# Altium PCB Copy of ISL6236 DEMO_PCB.PcbDoc
Units mm, origin at the board's own origin, x right, y up, seen from the top; angles counter-clockwise.
Board outline 50 x 50 mm, 6 copper layers (L1, L2, L3, L4, L5, L6), stack 1.231 mm thick; 41 components, 27 nets, 119 pads, 57 vias.
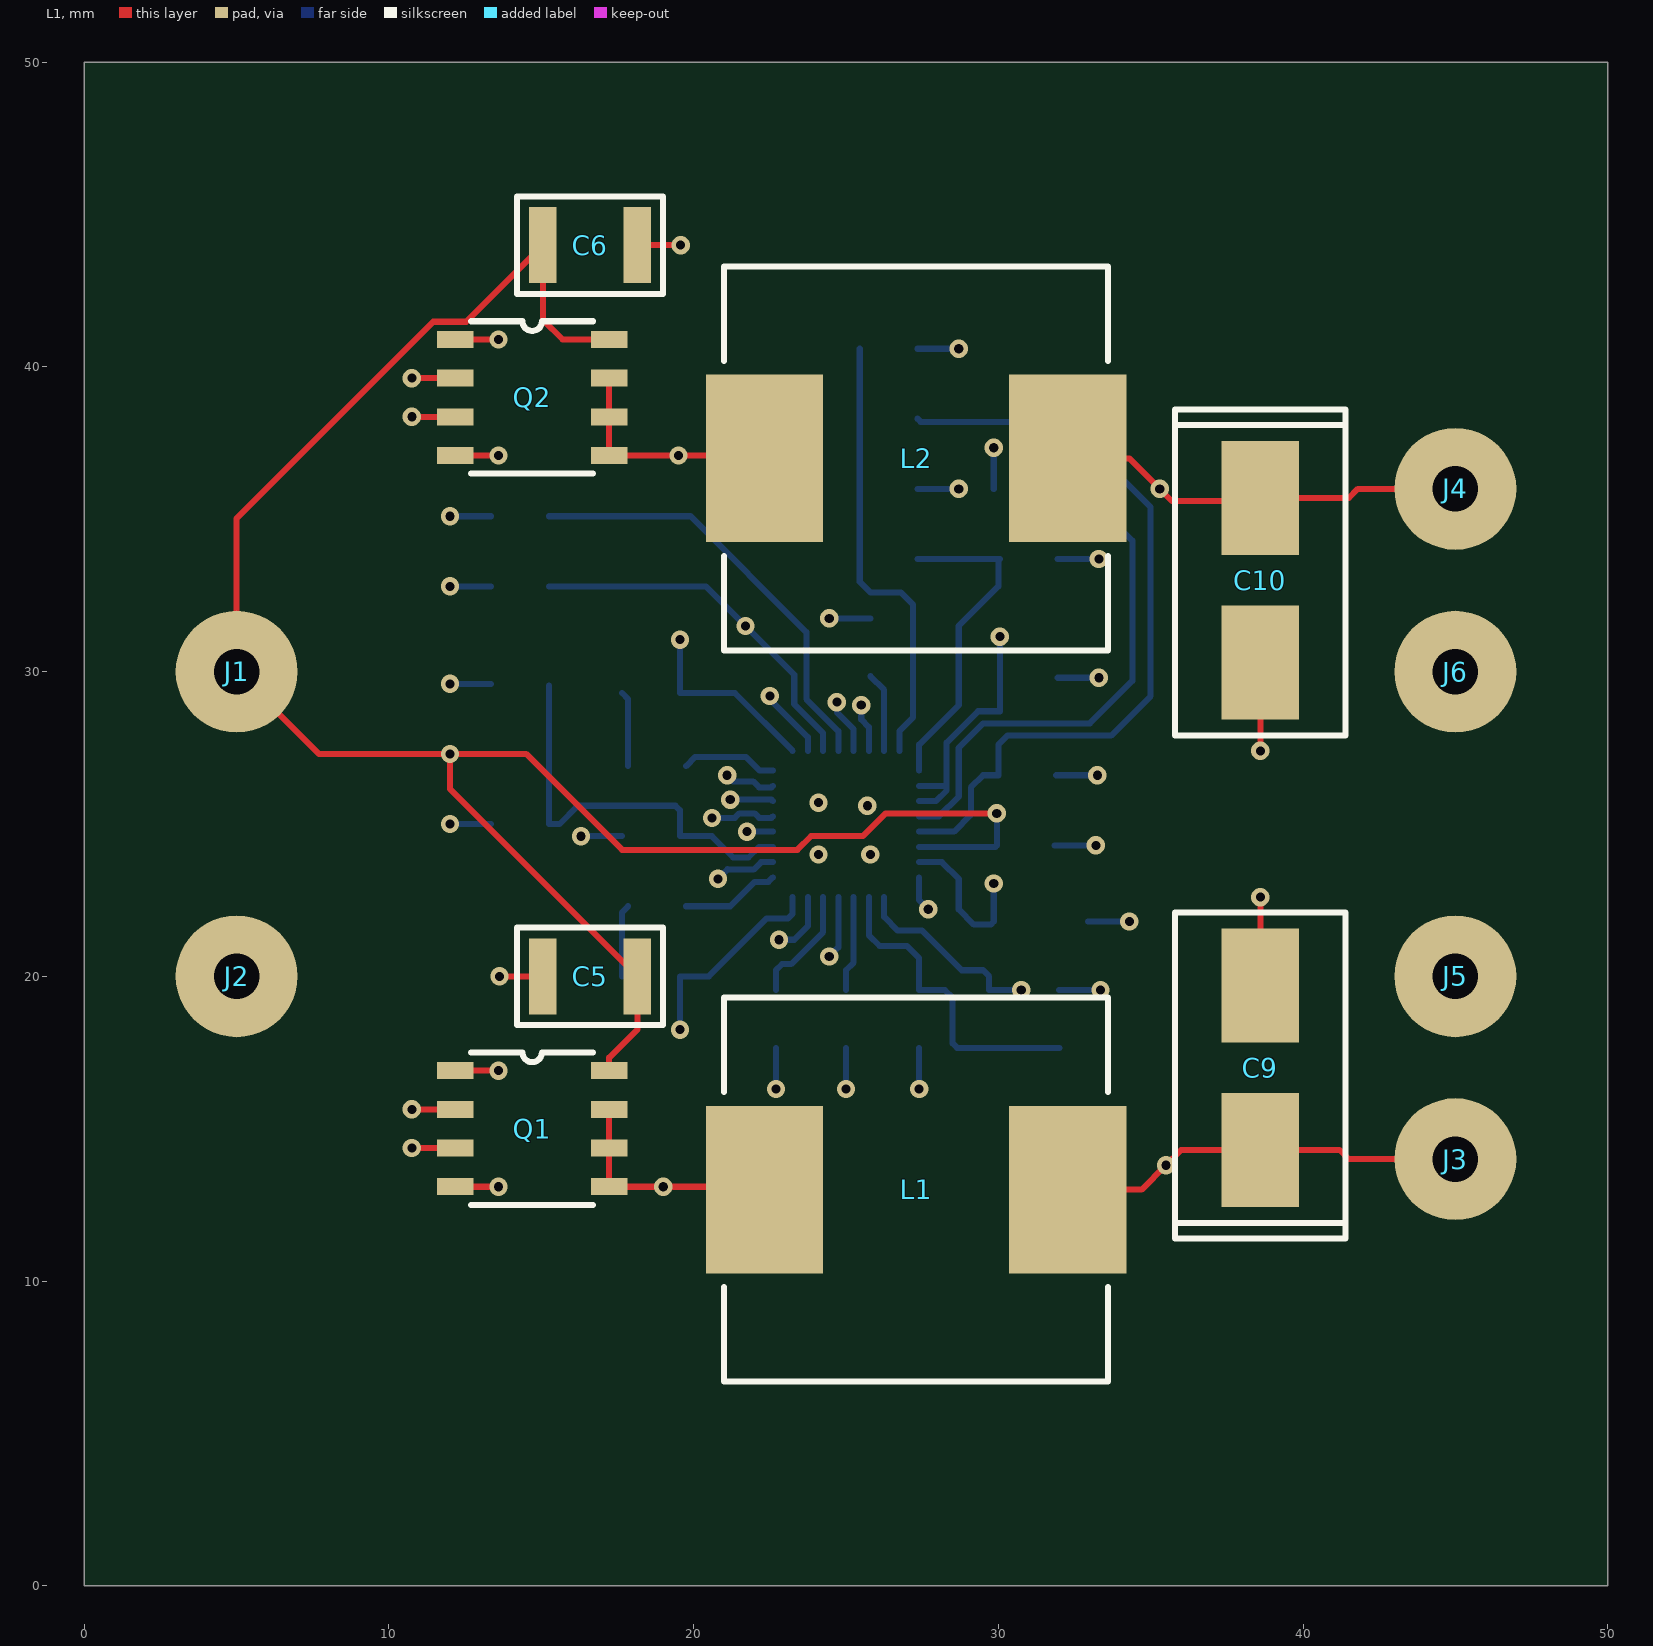
[diagram p0: L1 view]
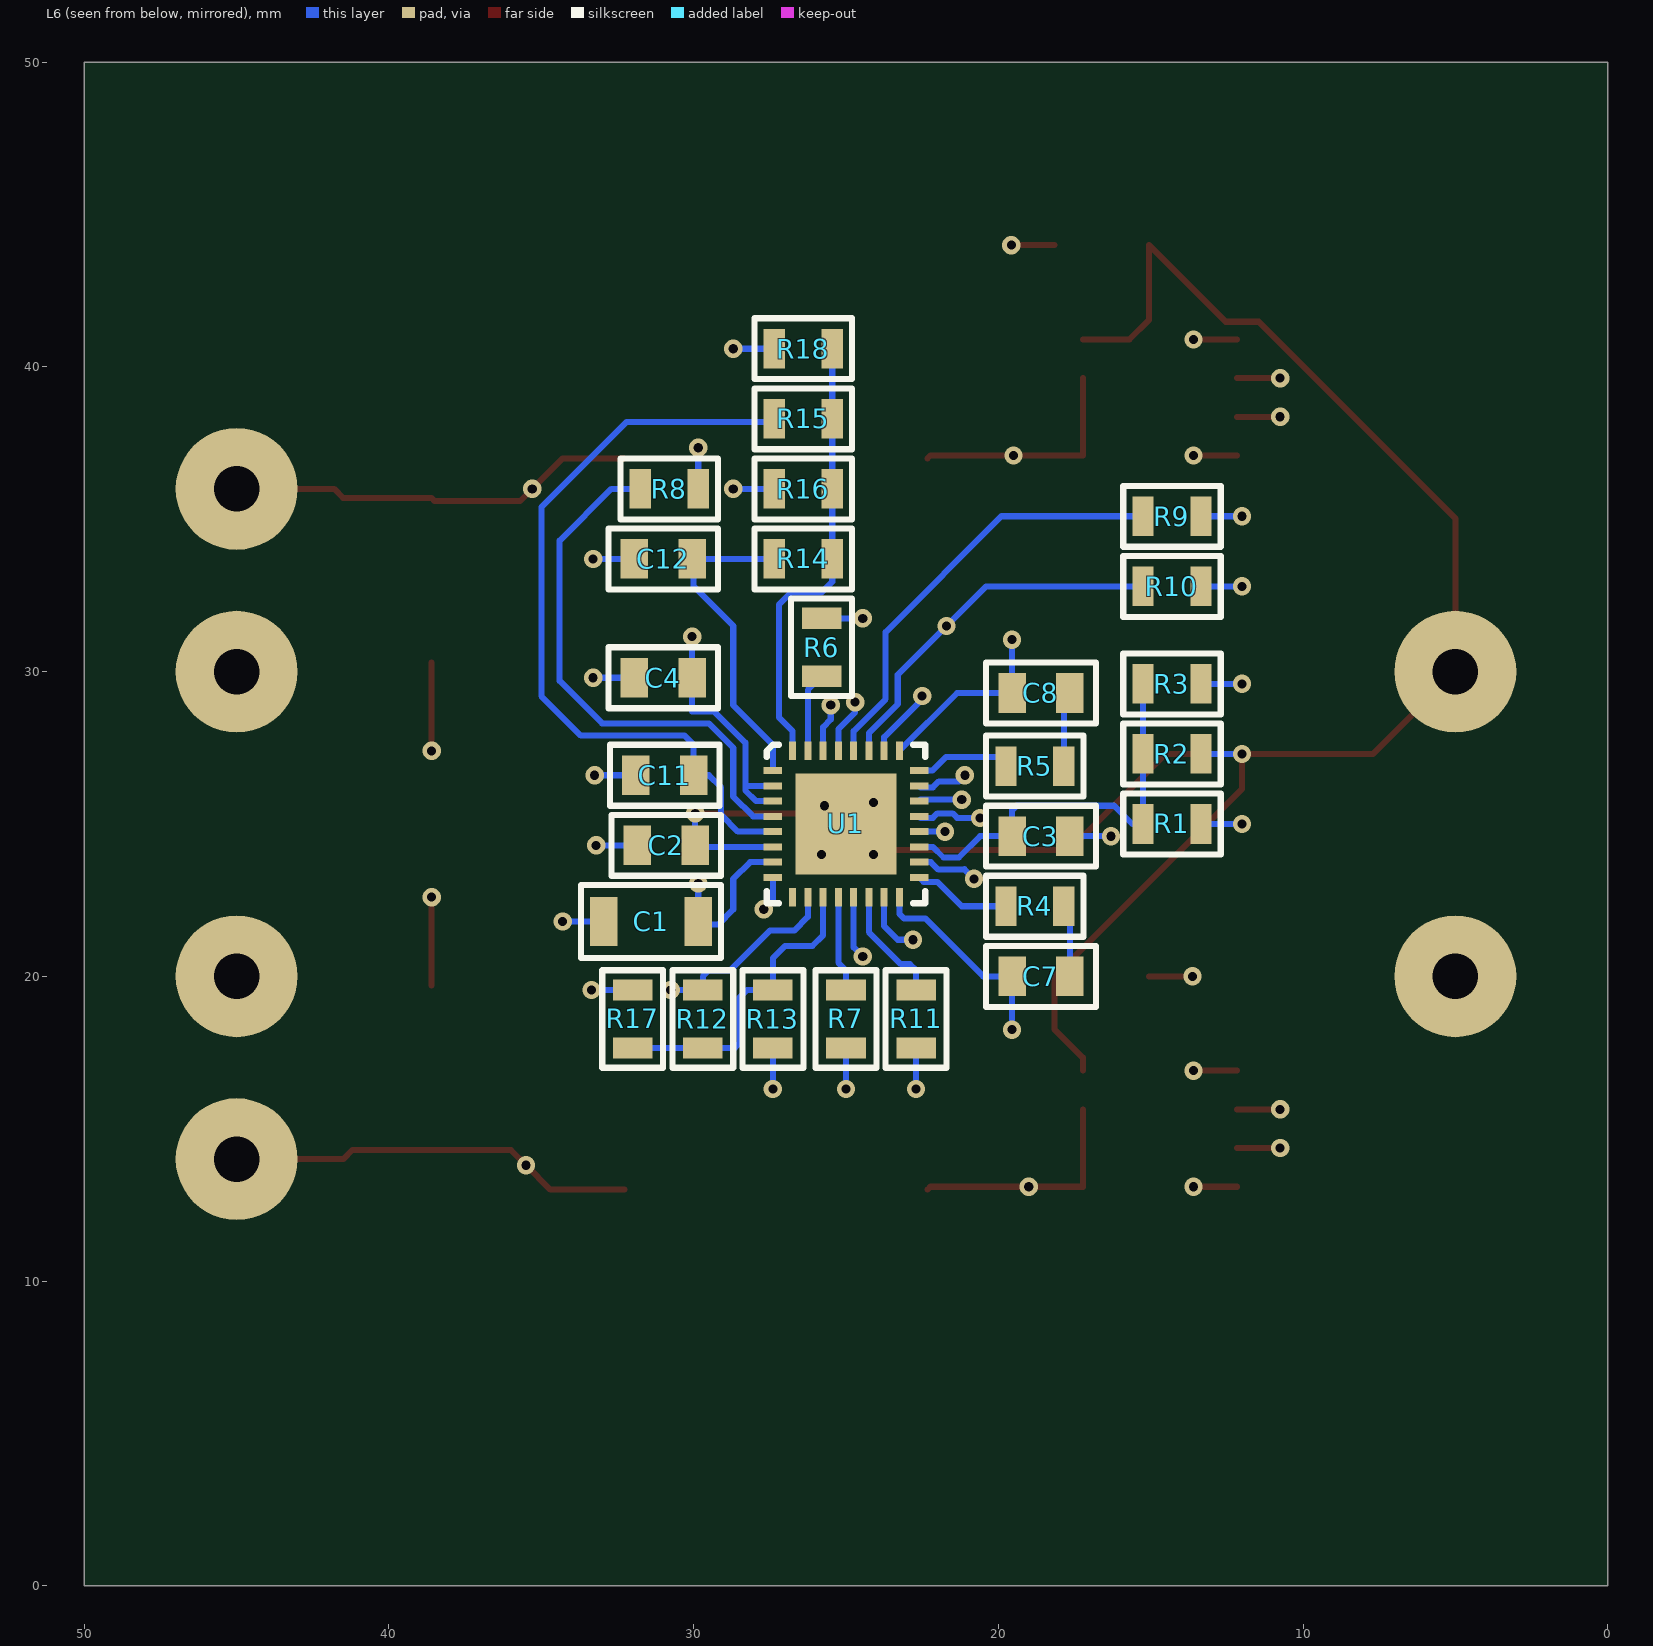
[diagram p1: L6 view, seen from below]
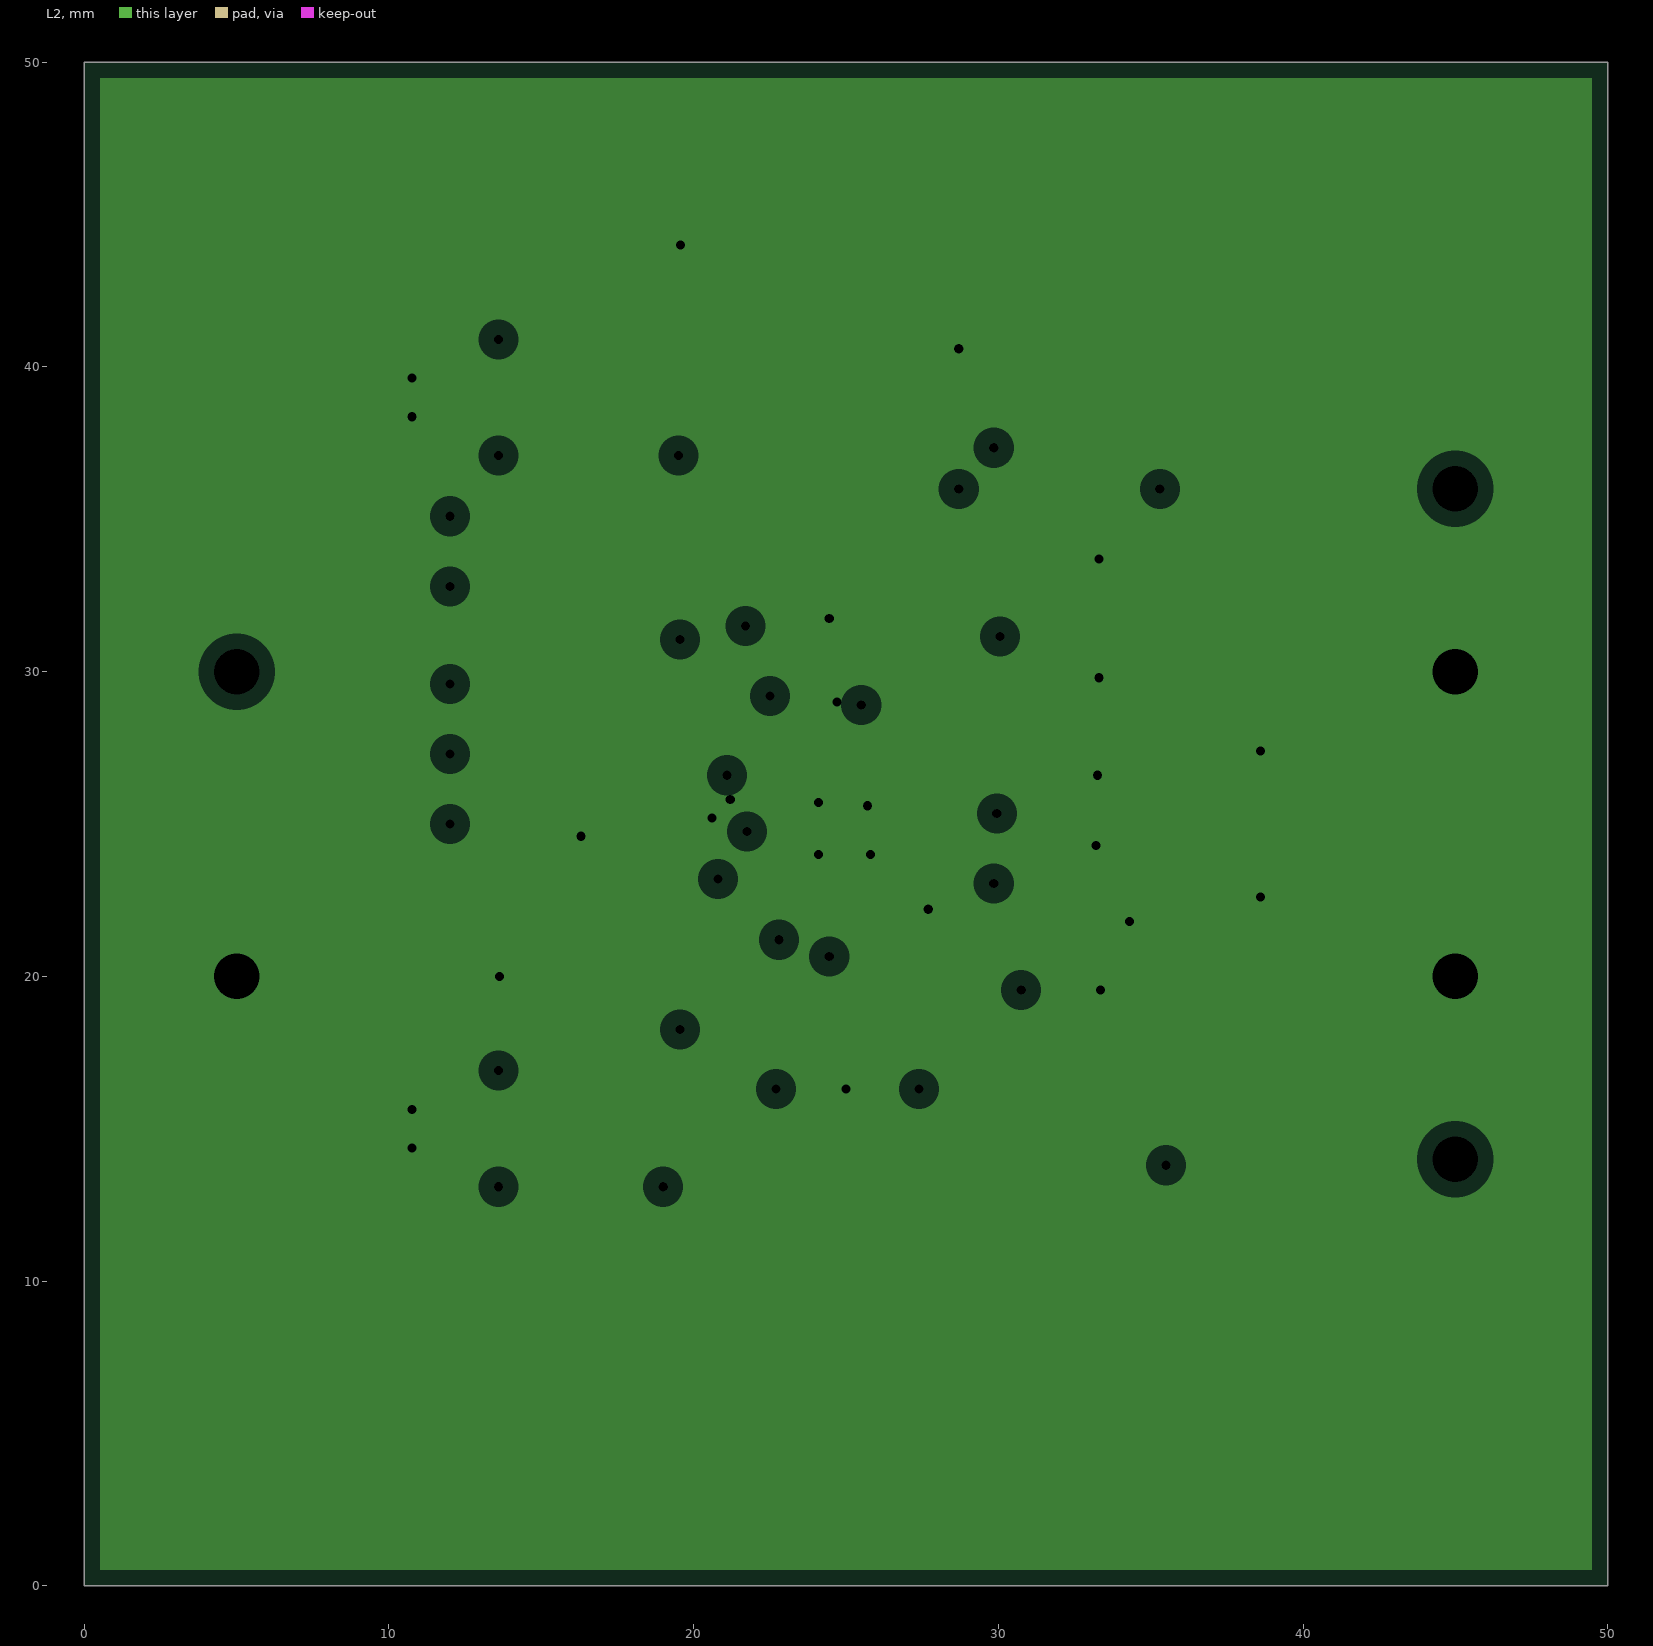
[diagram p2: L2, clearances drawn from the general rule]
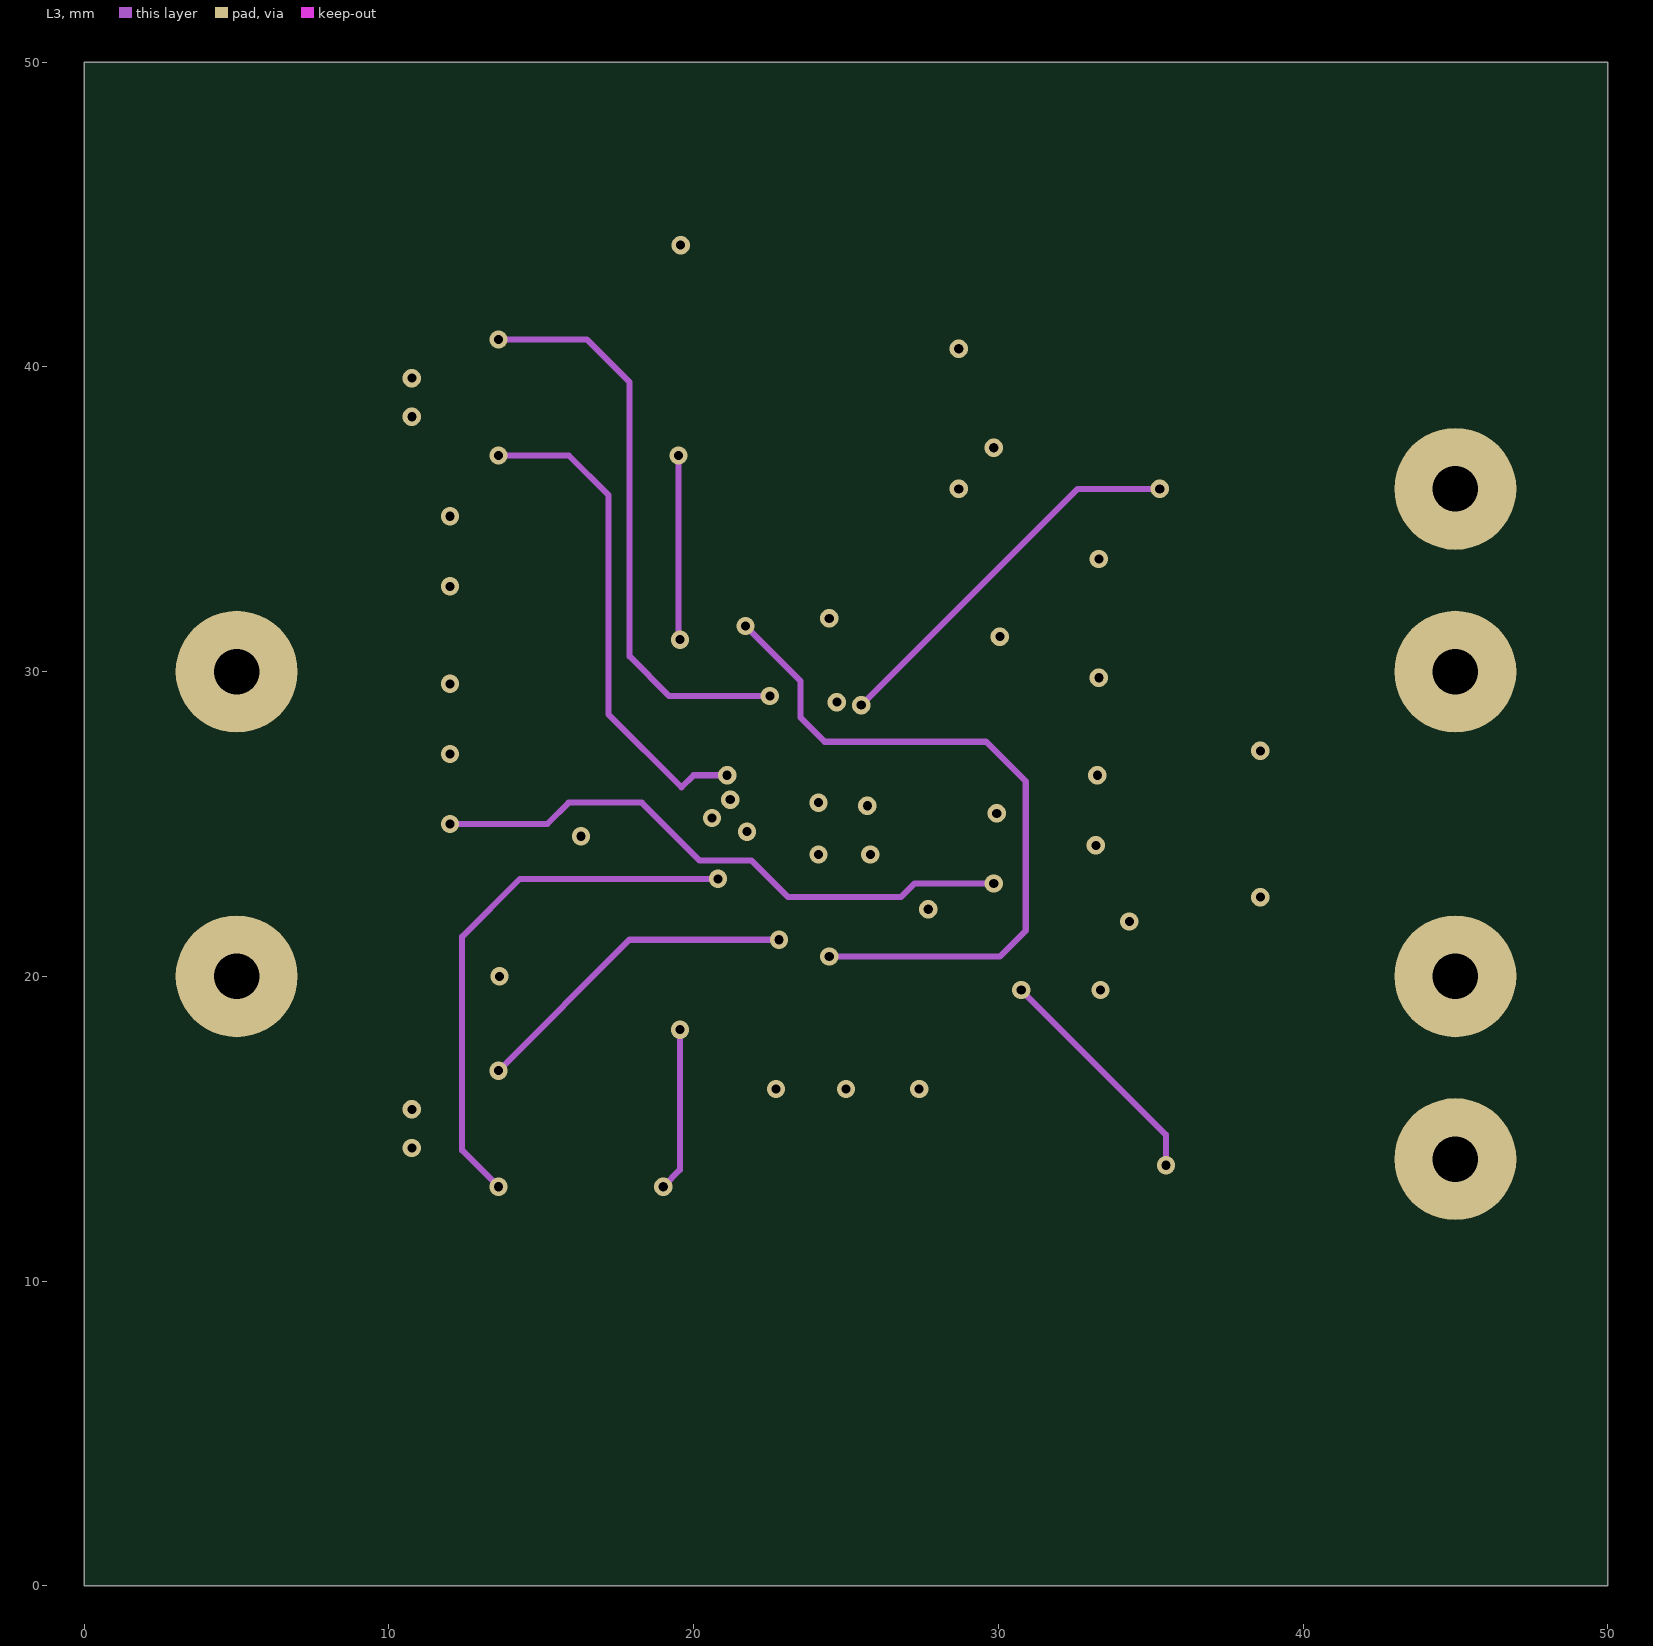
[diagram p3: L3]
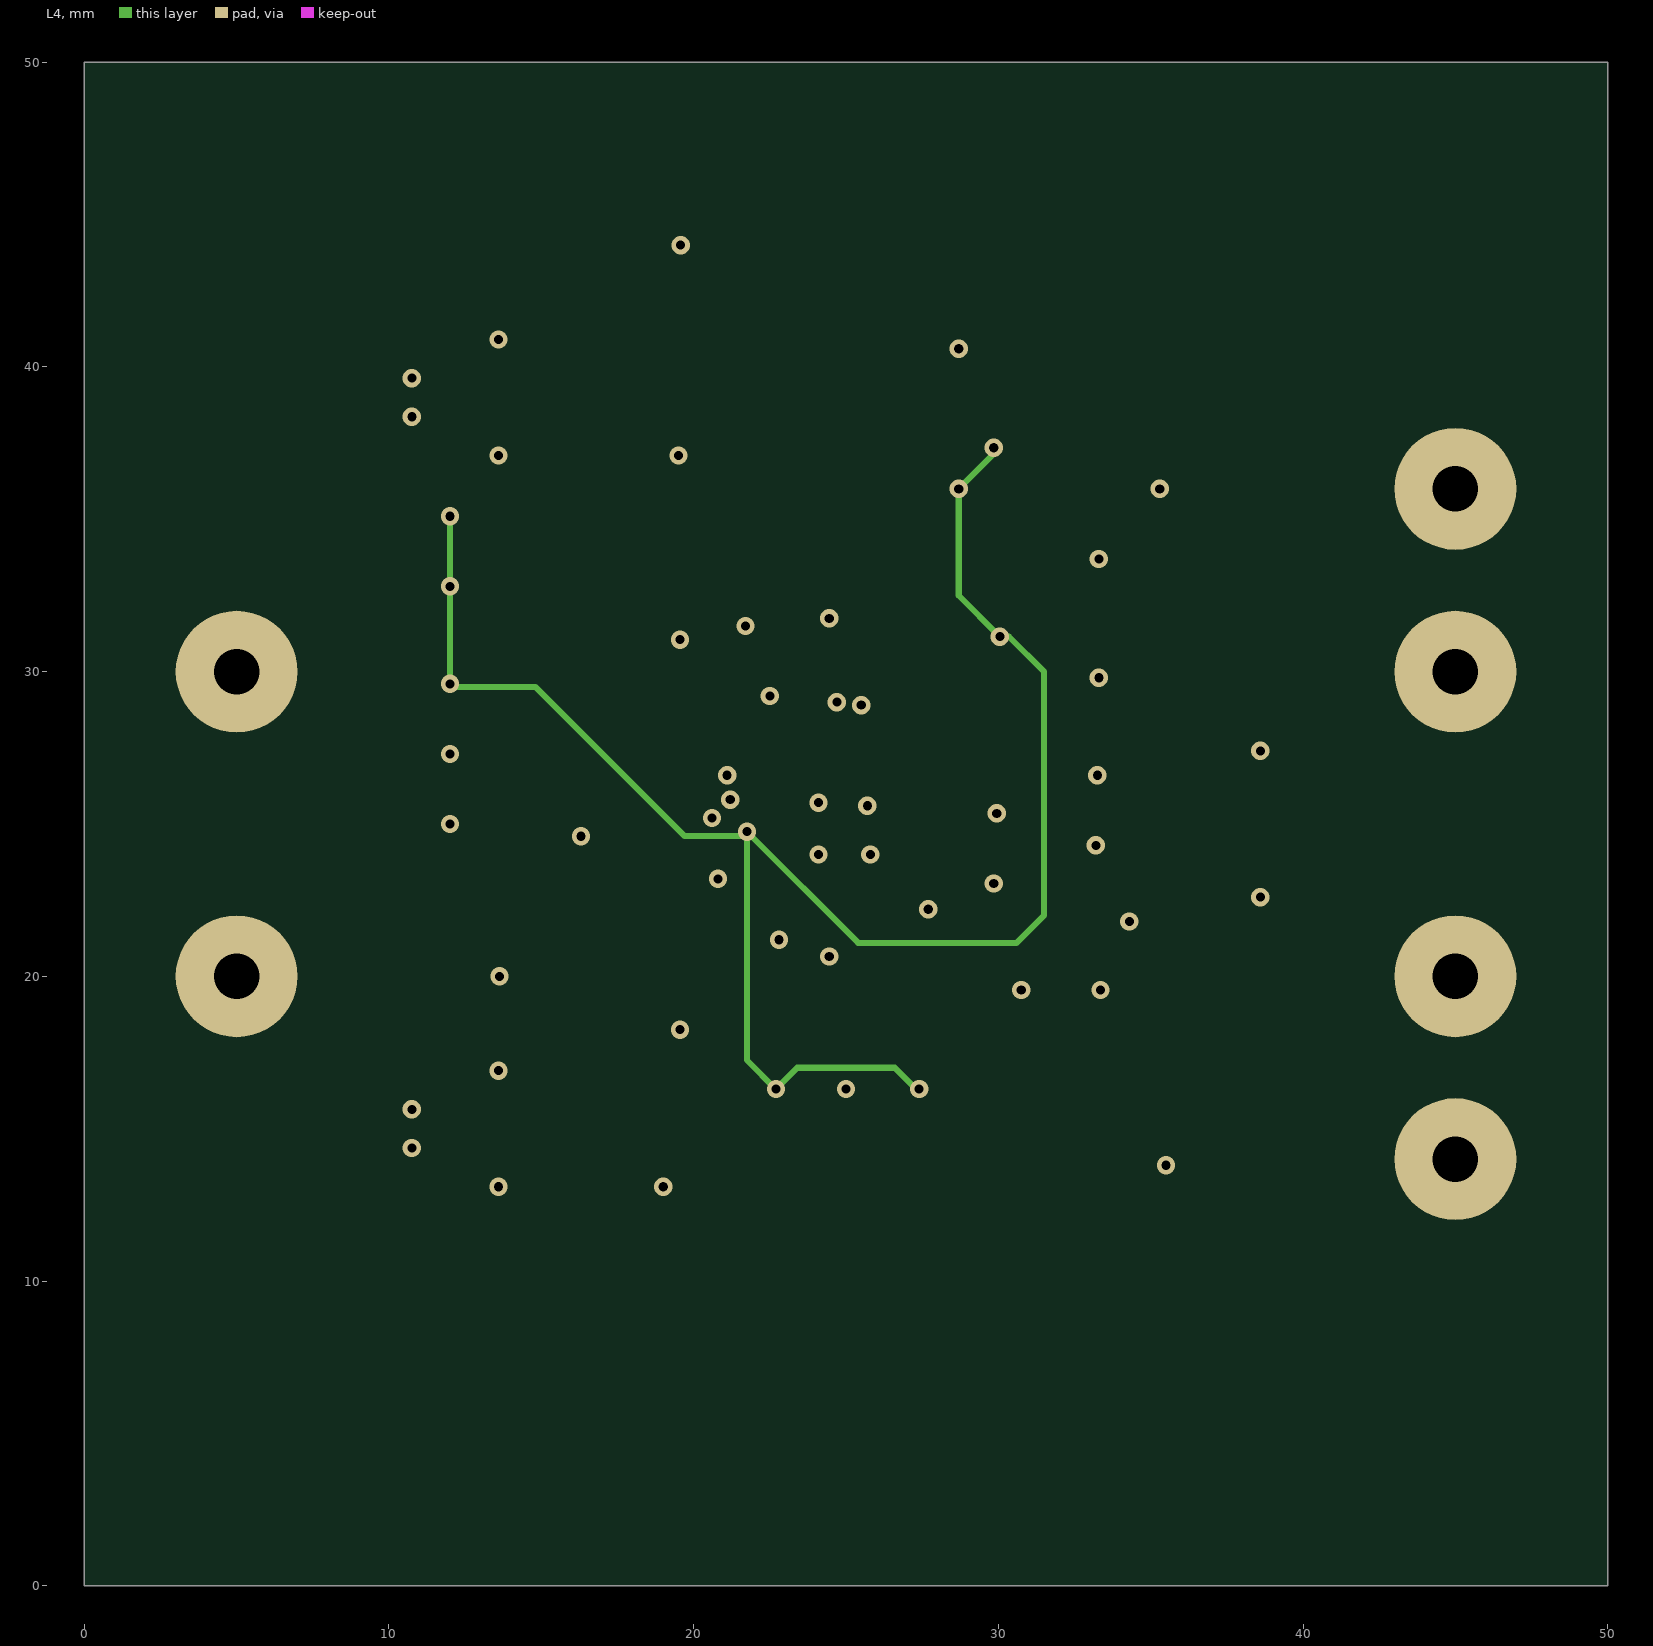
[diagram p4: L4]
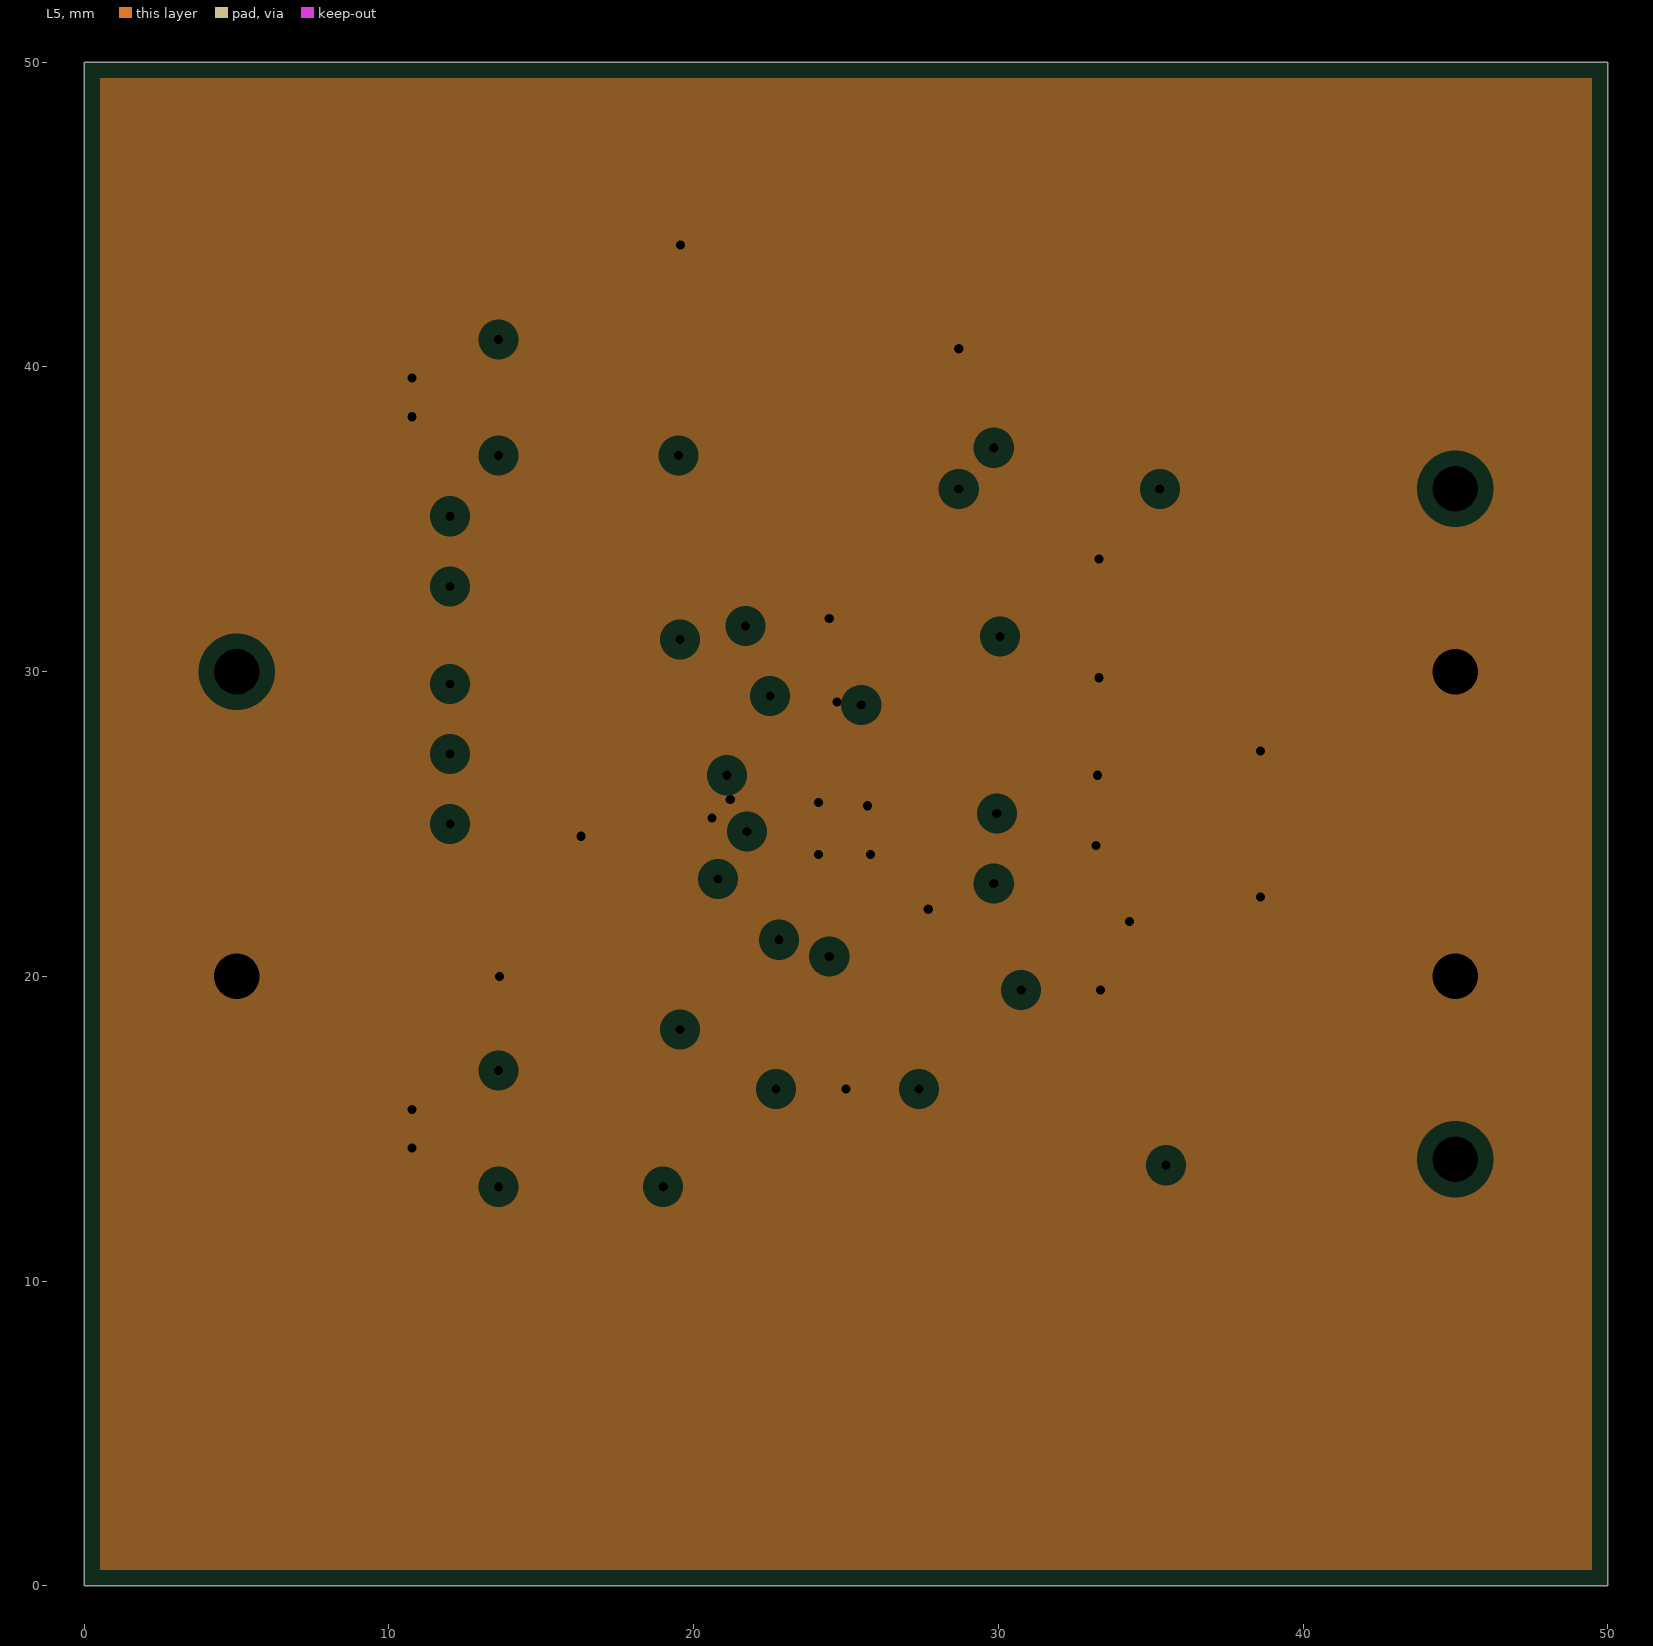
[diagram p5: L5, clearances drawn from the general rule]

## Layer stack, top to bottom
Top Solder: solder mask 0.0102, Solder Resist, Dk 3.5
L1: signal copper 0.0356
Dielectric 1: core 0.254, FR-4, Dk 4.2
L2: plane copper 0.036, net GND
Dielectric 3: prepreg 0.127, Dk 4.2
L3: signal copper 0.036
Dielectric 4: core 0.254, Dk 4.2
L4: signal copper 0.036
Dielectric 5: prepreg 0.127, Dk 4.2
L5: plane copper 0.036, net GND
Dielectric 2: core 0.254, Dk 4.2
L6: signal copper 0.0356
Bottom Solder: solder mask 0.0102, Solder Resist, Dk 3.5

## Board outline
0,0 50,0 50,50 0,50

## Design rules (kind name [scope] priority, off if disabled: settings)
Clearance [All] p1: gap=0.2 ignorepadtopadclearanceinfootprint=FALSE
ComponentClearance [All] p1: gap=0.099 collisioncheckmode=3 verticalgap=0.099 showdistances=FALSE
MinimumSolderMaskSliver [All] p1: minsoldermaskwidth=0.1
PlaneClearance [All] p1: clearance=0.508
PlaneConnect [All] p1: planeconnectstyle=Relief reliefexpansion=0.508 reliefentries=4 reliefconductorwidth=0.254 reliefairgap=0.254
PolygonConnect [All] p1: connectstyle=Relief reliefconductorwidth=0.254 reliefentries=4 polygonreliefangle="90 Angle" airgapwidth=0.254
RoutingVias [All] p1: holewidth=0.3 width=0.6 viastyle="Through Hole" minholewidth=0.3 minwidth=0.6 maxholewidth=0.3 maxwidth=0.6
SilkToSolderMaskClearance [IsPad] p1: minsilkscreentomaskgap=0.1 clearancetoexposedcopper=TRUE
SolderMaskExpansion [All] p1: expansion=0.102
Width [All] p1: maxlimit=10 minlimit=0.2 preferedwidth=0.2
25 further rules are at their usual default settings.

## Components (designator, comment, footprint, x,y, rotation, side; value= is the part's Value field where it differs from the comment)
C1 "4u7,50V" C1206 31.4,21.8 r180 bottom
C2 "1uF,50V" C0805 30.9,24.3 r180 bottom
C3 "1uF,50V" C0805 18.6,24.6 r0 bottom
C4 "1uF,50V" C0805 31,29.8 r180 bottom
C5 "10uF,35V" C1210 16.6,20 r0 top
C6 "10uF,35V" C1210 16.6,44 r180 top
C7 "100nF" C0805 18.6,20 r180 bottom
C8 "220nF" C0805 18.6,29.3 r0 bottom
C9 "330uF,10V" 7343-43 38.6,17 r90 top
C10 "330uF,10V" 7343-43 38.6,33 r270 top
C11 "10nF" C0805 30.95,26.6 r0 bottom
C12 "100nF" C0805 31,33.7 r0 bottom
J1 "4MMx1.5MM" PAD_WITH_HOLE_4MMx1MM5 5,30 r0 top
J2 "4MMx1.5MM" PAD_WITH_HOLE_4MMx1MM5 5,20 r0 top
J3 "4MMx1.5MM" PAD_WITH_HOLE_4MMx1MM5 45,14 r0 top
J4 "4MMx1.5MM" PAD_WITH_HOLE_4MMx1MM5 45,36 r0 top
J5 "4MMx1.5MM" PAD_WITH_HOLE_4MMx1MM5 45,20 r0 top
J6 "4MMx1.5MM" PAD_WITH_HOLE_4MMx1MM5 45,30 r0 top
L1 "3u3,DR125-3R3-R" DR125 27.3,13 r180 top
L2 "2U2,DR125-2R2-R" DR125 27.3,37 r0 top
Q1 "SI4816BDY-T1-GE3" SO-8 14.7,15 r0 top
Q2 "SI4816BDY-T1-GE3" SO-8 14.7,39 r0 top
R1 "0R" R0805 14.3,25 r180 bottom
R2 "0R" R0805 14.3,27.3 r0 bottom
R3 "10R" R0805 14.3,29.6 r0 bottom
R4 "1R" R0805 18.8,22.3 r0 bottom
R5 "1R" R0805 18.8,26.9 r180 bottom
R6 "200K" R0805 25.8,30.8 r90 bottom
R7 "200K" R0805 25,18.6 r90 bottom
R8 "10K" R0805 30.8,36 r180 bottom
R9 "200K" R0805 14.3,35.1 r180 bottom
R10 "200K" R0805 14.3,32.8 r180 bottom
R11 "10K" R0805 22.7,18.6 r270 bottom
R12 "DNF" R0805 29.7,18.6 r90 bottom
R13 "0R" R0805 27.4,18.6 r270 bottom
R14 "DNF" R0805 26.4,33.7 r0 bottom
R15 "0R" R0805 26.4,38.3 r0 bottom
R16 "DNF" R0805 26.4,36 r180 bottom
R17 "DNF" R0805 32,18.6 r270 bottom
R18 "DNF" R0805 26.4,40.6 r0 bottom
U1 "ISL6236AIRZ" L32.5x5B 25,25 r180 bottom

## Footprints (in the part's own frame and the unit in brackets; to place one, negate y for a bottom-side part, rotate by r counter-clockwise, add the part's x,y. Pads: shape width x height; smd on the part's side, far side on the other; paste and mask are expansions set on the pad)
7343-43 [mm]
  rect 3.75x2.55 smd: 1(-2.7,0) 2(2.7,0)
  silkscreen extent -5.6,-2.8 5.1,2.8
C0805 [mm]
  rect 0.9x1.3 smd: 1(-0.95,0) 2(0.95,0)
  silkscreen extent -1.8,-1 1.8,1
C1206 [mm]
  rect 0.9x1.6 smd: 1(-1.55,0) 2(1.55,0)
  silkscreen extent -2.3,-1.2 2.3,1.2
C1210 [mm]
  rect 0.9x2.5 smd: 1(-1.55,0) 2(1.55,0)
  silkscreen extent -2.4,-1.6 2.4,1.6
DR125 [mm]
  rect 3.85x5.5 smd: 1(-4.975,0) 2(4.975,0)
  silkscreen extent -6.3,-6.3 6.3,6.3
L32.5x5B [mm]
  rect 0.6x0.23 smd mask+0.051: 1(-2.4,1.75) 2(-2.4,1.25) 3(-2.4,0.75) 4(-2.4,0.25) 5(-2.4,-0.25) 6(-2.4,-0.75) 7(-2.4,-1.25) 8(-2.4,-1.75) 17(2.4,-1.75) 18(2.4,-1.25) 19(2.4,-0.75) 20(2.4,-0.25) 21(2.4,0.25) 22(2.4,0.75) 23(2.4,1.25) 24(2.4,1.75)
  rect 0.23x0.6 smd mask+0.051: 9(-1.75,-2.4) 10(-1.25,-2.4) 11(-0.75,-2.4) 12(-0.25,-2.4) 13(0.25,-2.4) 14(0.75,-2.4) 15(1.25,-2.4) 16(1.75,-2.4) 25(1.75,2.4) 26(1.25,2.4) 27(0.75,2.4) 28(0.25,2.4) 29(-0.25,2.4) 30(-0.75,2.4) 31(-1.25,2.4) 32(-1.75,2.4)
  rect 3.3x3.3 smd mask+0.051: 33(0,0)
  silkscreen extent -2.6,-2.6 2.6,2.6
PAD_WITH_HOLE_4MMx1MM5 [mm]
  round 4 hole 1.5: 1(0,0)
R0805 [mm]
  rect 0.7x1.3 smd: 1(-0.95,0) 2(0.95,0)
  silkscreen extent -1.6,-1 1.6,1
SO-8 [mm]
  rect 1.194x0.559 smd: 1(-2.527,1.905) 2(-2.527,0.635) 3(-2.527,-0.635) 4(-2.527,-1.905) 5(2.527,-1.905) 6(2.527,-0.635) 7(2.527,0.635) 8(2.527,1.905)
  silkscreen extent -2,-2.5 2,2.5

## Part data
C1: library part C3216X5R1H475K160AB, "C Series 1206 4.7 uF 50 V ±10 % Tolerance X5R SMT Multilayer Ceramic Capacitor", Capacitance=4.7uF, Case/Package=1206, Case Code (Metric)=3216, Dielectric=X5R, Dielectric Material=Ceramic, Manufacturer=TDK, Max Operating Temperature=85°C, Min Operating Temperature=-55°C, Package Quantity=1, Supplier Part Number 1=445-5994-6-ND, Tolerance=10%, Voltage Rating=50V, Case Code (Imperial)=1206, ComponentLink1Description=http://www.mouser.com/ds/2/400/lcc_commercial_general_en-837201.pdf?src-supplier=Mouser, ComponentLink1URL=http://www.mouser.com/ds/2/400/lcc_commercial_general_en-837201.pdf?src-supplier=Mouser, ComponentLink2Description=https://product.tdk.com/en/products/common/pdf/mlcc_partnumber_description.pdf?src-supplier=Digi-Key, ComponentLink2URL=https://product.tdk.com/en/products/common/pdf/mlcc_partnumber_description.pdf?src-supplier=Digi-Key, ComponentLink3Description=https://product.tdk.com/info/en/documents/chara_sheet/C3216X5R1H475K160AB.pdf?src-supplier=Digi-Key, ComponentLink3URL=https://product.tdk.com/info/en/documents/chara_sheet/C3216X5R1H475K160AB.pdf?src-supplier=Digi-Key, Composition=Ceramic, Depth=1.6mm, Height=1.6mm, Lead Free="Lead Free", Length=3.2mm, Manufacturer Part Number=C3216X5R1H475K160AB, Mount="Surface Mount", Packaging="Tape and Reel", Pricing 1="1=0.9, 10=0.664, 100=0.4554, 500=0.36052, 1000=0.3036 (USD)", Stock 1=2272, Supplier 1=Digi-Key, Termination=SMD/SMT, Thickness=0.071inch, Voltage Rating (DC)=50V, Weight=0.000571oz, Width=1.6mm
C2 C3 C4: library part C0805C105K5RACTU, "CAP CER 1UF 50V X7R 0805", Capacitance=1uF, Case/Package=0805, Case Code (Metric)=2012, Dielectric=X7R, Dielectric Material=Ceramic, Manufacturer=KEMET, Max Operating Temperature=125°C, Min Operating Temperature=-55°C, Package Quantity=1, Supplier Part Number 1=399-7409-6-ND, Tolerance=10%, Voltage=50V, Case Code (Imperial)=0805, ComponentLink1Description=http://www.farnell.com/datasheets/2740426.pdf?src-supplier=Element14, ComponentLink1URL=http://www.farnell.com/datasheets/2740426.pdf?src-supplier=Element14, ComponentLink2Description=http://www.mouser.com/ds/2/212/KEM_C1002_X7R_SMD-1102033.pdf?src-supplier=Mouser, ComponentLink2URL=http://www.mouser.com/ds/2/212/KEM_C1002_X7R_SMD-1102033.pdf?src-supplier=Mouser, Contact Plating=Tin,Matte, Depth=1.25mm, Height=1.25mm, Length=2mm, Manufacturer Part Number=C0805C105K5RACTU, Mount="Surface Mount,PCB", Packaging="Tape and Reel", Pricing 1="1=0.4, 10=0.277, 100=0.1662, 500=0.12466, 1000=0.10527 (USD)", REACH SVHC="No SVHC", Stock 1=193296, Supplier 1=Digi-Key, Termination=SMD/SMT, Thickness=0.055inch, Voltage Rating=50V, Voltage Rating (DC)=50V, Width=0.049inch
C5 C6: library part C1210C106K6PACTU, "KEMET - C1210C106K6PACTU - SMD Multilayer Ceramic Capacitor, 10 µF, 35 V, 1210 [3225 Metric], ± 10%, X5R, C Series KEMET", Capacitance=10uF, Case/Package=1210, Case Code (Metric)=3225, Dielectric=X5R, Dielectric Material=Ceramic, Manufacturer=KEMET, Max Operating Temperature=85°C, Min Operating Temperature=-55°C, Supplier Part Number 1=399-12070-6-ND, Tolerance=10%, Voltage=35V, Case Code (Imperial)=1210, ComponentLink1Description=http://www.farnell.com/datasheets/2741192.pdf?src-supplier=Farnell, ComponentLink1URL=http://www.farnell.com/datasheets/2741192.pdf?src-supplier=Farnell, ComponentLink2Description=https://api.kemet.com/component-edge/download/datasheet/C1210C106K6PAC7800.pdf?src-supplier=Digi-Key, ComponentLink2URL=https://api.kemet.com/component-edge/download/datasheet/C1210C106K6PAC7800.pdf?src-supplier=Digi-Key, ComponentLink3Description=http://www.kemet.com/docfinder?Partnumber=C1210C106K6PAC7800&src-supplier=Digi-Key, ComponentLink3URL=http://www.kemet.com/docfinder?Partnumber=C1210C106K6PAC7800&src-supplier=Digi-Key, ComponentLink4Description=http://www.alliedelec.com/m/d/f3c02ddb98afa3dd1adcb801109671e9.pdf?src-supplier=Allied+Electronics, ComponentLink4URL=http://www.alliedelec.com/m/d/f3c02ddb98afa3dd1adcb801109671e9.pdf?src-supplier=Allied+Electronics, ComponentLink5Description=http://www.farnell.com/datasheets/2741192.pdf?src-supplier=Newark, ComponentLink5URL=http://www.farnell.com/datasheets/2741192.pdf?src-supplier=Newark, Depth=2.5mm, Dissipation Factor=2.5%, Height=1.9mm, Lead Free="Lead Free", Length=0.126inch, Manufacturer Part Number=C1210C106K6PACTU, Mount="Surface Mount", Packaging="Tape and Reel", Pricing 1="1=0.82, 10=0.603, 100=0.4138, 500=0.3276, 1000=0.27588 (USD)", Stock 1=40357, Supplier 1=Digi-Key, Termination=Solder, Thickness=0.083inch, Voltage Rating=35V, Voltage Rating (DC)=35V, Width=0.098inch
C7 C12: library part C0805C104K5RACTU, "Cap Ceramic 0.1uF 50V X7R 10% SMD 2.0 x 1.2 mm 125 C Paper T/R", Case/Package=0805, Case Code (Metric)=2012, Dielectric=X7R, Dielectric Material=Ceramic, Manufacturer=KEMET, Max Operating Temperature=125°C, Min Operating Temperature=-55°C, Package Quantity=4000, Supplier Part Number 1=399-1170-6-ND, Tolerance=10%, Voltage=500V, Voltage Rating=50V, Capacitance=100nF, Case Code (Imperial)=0805, ComponentLink1Description=http://www.alliedelec.com/m/d/9bfe7773041ffe9d406e68bc7b377fdd.pdf?src-supplier=Allied+Electronics, ComponentLink1URL=http://www.alliedelec.com/m/d/9bfe7773041ffe9d406e68bc7b377fdd.pdf?src-supplier=Allied+Electronics, ComponentLink2Description=http://www.farnell.com/datasheets/2740684.pdf?src-supplier=Element14, ComponentLink2URL=http://www.farnell.com/datasheets/2740684.pdf?src-supplier=Element14, ComponentLink3Description=https://www.distrelec.biz/Web/Downloads/_t/ds/KEM_C1002_X7R_SMD_eng_tds.pdf?mime=application%2Fpdf&src-supplier=Distrelec, ComponentLink3URL=https://www.distrelec.biz/Web/Downloads/_t/ds/KEM_C1002_X7R_SMD_eng_tds.pdf?mime=application%2Fpdf&src-supplier=Distrelec, Contact Plating=Tin,Matte, Depth=1.25mm, Height=0.9mm, Lead Pitch=0.75mm, Length=2mm, Manufacturer Part Number=C0805C104K5RACTU, Mount="Surface Mount,PCB", Number of Pins=2, Packaging="Tape and Reel", Pricing 1="1=0.17, 10=0.121, 100=0.0567, 500=0.03976, 1000=0.03291 (USD)", Radiation Hardening=No, REACH SVHC="No SVHC", Stock 1=1647254, Supplier 1=Digi-Key, Termination=SMD/SMT, Thickness=0.035inch, Voltage Rating (DC)=50V, Width=1.2mm
C8: library part C0805C224K5RACTU, "CAP CER 0.22UF 50V X7R 0805", Case/Package=0805, Case Code (Metric)=2012, Dielectric=X7R, Dielectric Material=Ceramic, Manufacturer=KEMET, Max Operating Temperature=125°C, Min Operating Temperature=-55°C, Package Quantity=1, Supplier Part Number 1=399-3491-6-ND, Tolerance=10%, Voltage=50V, Capacitance=220nF, Case Code (Imperial)=0805, ComponentLink1Description=http://www.kemet.com/kemet/web/homepage/kechome.nsf/vapubfiles/KEM_C1002_X7R_SMD.pdf/$file/KEM_C1002_X7R_SMD.pdf?src-supplier=Element14, ComponentLink1URL=http://www.kemet.com/kemet/web/homepage/kechome.nsf/vapubfiles/KEM_C1002_X7R_SMD.pdf/$file/KEM_C1002_X7R_SMD.pdf?src-supplier=Element14, ComponentLink2Description=https://www.verical.com/server-webapp/html/getDatasheet?partID=304413&src-supplier=Verical, ComponentLink2URL=https://www.verical.com/server-webapp/html/getDatasheet?partID=304413&src-supplier=Verical, ComponentLink3Description=http://www.farnell.com/datasheets/2739716.pdf?src-supplier=Element14, ComponentLink3URL=http://www.farnell.com/datasheets/2739716.pdf?src-supplier=Element14, ComponentLink4Description=https://search.kemet.com/component-edge/download/datasheet/C0805C224K5RACTU.pdf?src-supplier=Allied+Electronics, ComponentLink4URL=https://search.kemet.com/component-edge/download/datasheet/C0805C224K5RACTU.pdf?src-supplier=Allied+Electronics, Depth=1.25mm, Dissipation Factor=2.5%, Height=1.1mm, Lead Pitch=0.75mm, Length=2mm, Manufacturer Part Number=C0805C224K5RACTU, Mount="Surface Mount,PCB", Packaging="Tape and Reel", Pricing 1="1=0.2, 10=0.139, 100=0.0655, 500=0.04592, 1000=0.03802 (USD)", Radiation Hardening=No, REACH SVHC="No SVHC", Stock 1=1352987, Supplier 1=Digi-Key, Termination=SMD/SMT, Thickness=0.055inch, Voltage Rating=50V, Voltage Rating (DC)=50V, Width=0.049inch
C9 C10: library part T530X337M010ATE004, "Tantalum Capacitors - Polymer SMD 330uF 10volts 20%", Capacitance=330uF, Case/Package=2917, Case Code (Metric)=7343, ESR (Equivalent Series Resistance)=4mR, Leakage Current=330uA, Manufacturer=KEMET, Max Operating Temperature=125°C, Min Operating Temperature=-55°C, Package Quantity=500, Ripple Current=8.2A, Supplier Part Number 1=399-10378-6-ND, Tolerance=20%, Voltage=10V, Case Code (Imperial)=2917, ComponentLink1Description=https://www.alliedelec.com/m/d/c2b5846d1b4015924ec44504ba06510b.pdf?src-supplier=Allied+Electronics, ComponentLink1URL=https://www.alliedelec.com/m/d/c2b5846d1b4015924ec44504ba06510b.pdf?src-supplier=Allied+Electronics, ComponentLink2Description=http://uk.rs-online.com/webdocs/1529/0900766b815291cb.pdf?src-supplier=RSComponents, ComponentLink2URL=http://uk.rs-online.com/webdocs/1529/0900766b815291cb.pdf?src-supplier=RSComponents, Depth=4.3mm, Dissipation Factor=8%, Features="General Purpose", Height=4mm, Height - Seated (Max)=0.169inch, Length=7.3mm, Life (Hours)=2000Hour, Manufacturer Part Number=T530X337M010ATE004, Mount="Surface Mount,PCB", Packaging="Tape and Reel", Polarity=Polar, Pricing 1="1=6.86, 10=6.095, 100=4.876 (USD)", REACH SVHC="No SVHC", Stock 1=3645, Supplier 1=Digi-Key, Termination=SMD/SMT, Voltage Rating=10V, Voltage Rating (DC)=10V, Width=4.3mm
C11: library part C0805F103K5RACTU, "KEMET - C0805F103K5RACTU - SMD Multilayer Ceramic Capacitor, FO-CAP, 10000 pF, 50 V, 0805 [2012 Metric], ± 10%, X7R", Case/Package=0805, Case Code (Metric)=2012, Dielectric=X7R, Dielectric Material=Ceramic, Manufacturer=KEMET, Max Operating Temperature=125°C, Min Operating Temperature=-55°C, Package Quantity=4000, Supplier Part Number 1=399-5107-6-ND, Tolerance=10%, Voltage=50V, Capacitance=10nF, Case Code (Imperial)=0805, ComponentLink1Description=https://search.kemet.com/component-edge/download/datasheet/C0805F103K5RACTU.pdf?src-supplier=Digi-Key, ComponentLink1URL=https://search.kemet.com/component-edge/download/datasheet/C0805F103K5RACTU.pdf?src-supplier=Digi-Key, ComponentLink2Description=http://www.farnell.com/datasheets/2739722.pdf?src-supplier=Element14, ComponentLink2URL=http://www.farnell.com/datasheets/2739722.pdf?src-supplier=Element14, Depth=1.25mm, Height=0.9mm, Lead Pitch=0.75mm, Length=2mm, Manufacturer Part Number=C0805F103K5RACTU, Mount="Surface Mount", Number of Pins=2, Packaging="Tape and Reel", Pricing 1="1=0.34, 10=0.236, 100=0.1417, 500=0.10624, 1000=0.08972 (USD)", Radiation Hardening=No, REACH SVHC="No SVHC", Stock 1=98475, Supplier 1=Digi-Key, Termination=SMD/SMT, Thickness=0.039inch, Voltage Rating=50V, Voltage Rating (DC)=50V, Width=1.25mm
J1 J2 J3 J4 J5 J6: library part PAD_WITH_HOLE_4MMx1MM5, "Pad with a hole 4mm x 1.5mm"
L1: library part DR125-3R3-R, "COILTRONICS         DR125-3R3-R             Surface Mount Power Inductor, DR Series, 3.3 H, 9.26 A, 12.7 A, Shielded", Case/Package=0125, DC Resistance (DCR)=6.3mR, Inductance=3.3uH, Inductance Tolerance=20%, Manufacturer="Eaton Coiltronics", Max DC Current=12.7A, Max Operating Temperature=125°C, Min Operating Temperature=-40°C, Package Quantity=600, RMS Current (Irms)=9.26A, Self Resonant Frequency=100kHz, Supplier Part Number 1=513-1529-6-ND, ComponentLink1Description=http://www.farnell.com/datasheets/87246.pdf?src-supplier=Element14, ComponentLink1URL=http://www.farnell.com/datasheets/87246.pdf?src-supplier=Element14, Core Material=Ferrite, Depth=12.5mm, Height=6mm, Lead Free="Lead Free", Length=12.5mm, Manufacturer Part Number=DR125-3R3-R, Military Standard=Not, Mount="Surface Mount", Number of Pins=2, Packaging="Tape and Reel", Pricing 1="1=2.03, 10=1.873, 100=1.3113 (USD)", Radiation Hardening=No, REACH SVHC="No SVHC", Saturation Current=12.7A, Shielding=Shielded, Stock 1=1635, Supplier 1=Digi-Key, Termination=SMD/SMT, Test Frequency=100kHz, Tolerance=20%, Weight=0.144oz, Width=12.5mm
L2: library part DR125-2R2-R, "FIXED IND 2.2UH 10.9A 4.5 MOHM", Case/Package=Nonstandard, Current Rating=10.9A, DC Resistance (DCR)=4.5mR, Inductance=2.2uH, Inductance Tolerance=20%, Manufacturer="Eaton Cooper", Max Operating Temperature=125°C, Min Operating Temperature=-40°C, Package Quantity=600, Saturation Current=15A, Self Resonant Frequency=100kHz, Supplier Part Number 1=513-1662-6-ND, ComponentLink1Description=https://www.verical.com/server-webapp/html/getDatasheet?partID=571249&src-supplier=Verical, ComponentLink1URL=https://www.verical.com/server-webapp/html/getDatasheet?partID=571249&src-supplier=Verical, ComponentLink2Description=http://uk.rs-online.com/webdocs/116a/0900766b8116a153.pdf?src-supplier=RSComponents, ComponentLink2URL=http://uk.rs-online.com/webdocs/116a/0900766b8116a153.pdf?src-supplier=RSComponents, ComponentLink3Description=http://www.farnell.com/datasheets/87246.pdf?src-supplier=Element14, ComponentLink3URL=http://www.farnell.com/datasheets/87246.pdf?src-supplier=Element14, Composition=Wirewound, Core Material=Ferrite, DC Current=10.9A, Depth=12.5mm, Height=6mm, Height - Seated (Max)=0.236inch, Lead Free="Lead Free", Length=12.5mm, Manufacturer Part Number=DR125-2R2-R, Max DC Current=10.9A, Military Standard=Not, Mount="Surface Mount", Number of Pins=2, Packaging="Tape and Reel", Pricing 1="1=2.03, 10=1.873, 100=1.3113 (USD)", Radiation Hardening=No, REACH SVHC="No SVHC", RMS Current (Irms)=10.9A, Shielding=Shielded, Stock 1=508, Supplier 1=Digi-Key, Termination=SMD/SMT, Test Frequency=100kHz, Tolerance=20%, Weight=0.144oz, Width=0.492inch
Q1 Q2: "MOSFET 2N-CH 30V 5.8A 8-SOIC", Case/Package=SO, Continuous Drain Current (ID)=5.8A, Drain to Source Resistance=9.3mR, Drain to Source Voltage (Vdss)=30V, Gate to Source Voltage (Vgs)=20V, Manufacturer="Vishay Siliconix", Max Operating Temperature=150°C, Max Power Dissipation=1.25W, Min Operating Temperature=-55°C, On-State Resistance=18.5mR, Package Quantity=1, Supplier Part Number 1=SI4816BDY-T1-GE3DKR-ND, Threshold Voltage=3V, ComponentLink1Description=http://www.farnell.com/datasheets/1911984.pdf?src-supplier=Element14, ComponentLink1URL=http://www.farnell.com/datasheets/1911984.pdf?src-supplier=Element14, ComponentLink2Description=http://www.farnell.com/datasheets/2049212.pdf?src-supplier=Element14, ComponentLink2URL=http://www.farnell.com/datasheets/2049212.pdf?src-supplier=Element14, ComponentLink3Description=http://www.vishay.com/docs/73026/si4816bd.pdf?src-supplier=Future+Electronics, ComponentLink3URL=http://www.vishay.com/docs/73026/si4816bd.pdf?src-supplier=Future+Electronics, ComponentLink4Description=http://www.vishay.com/docs/73026/si4816bd.pdf?src-supplier=Digi-Key, ComponentLink4URL=http://www.vishay.com/docs/73026/si4816bd.pdf?src-supplier=Digi-Key, ComponentLink5Description=http://www.vishay.com/docs/73026/si4816bd.pdf?src-supplier=Avnet, ComponentLink5URL=http://www.vishay.com/docs/73026/si4816bd.pdf?src-supplier=Avnet, ComponentLink6Description=http://datasheet.iiic.cc/vishay_[siliconix]/SI4816BDY-T1-GE3.pdf?src-supplier=IIIC, ComponentLink6URL=http://datasheet.iiic.cc/vishay_[siliconix]/SI4816BDY-T1-GE3.pdf?src-supplier=IIIC, Contact Plating=Tin,Matte, Fall Time=9ns, FET Type="2 N-Channel", Height=1.55mm, Lead Free="Lead Free", Length=5mm, Manufacturer Part Number=SI4816BDY-T1-GE3, Mount="Surface Mount", Number of Channels=2, Number of Elements=2, Number of Pins=8, Packaging="Tape and Reel", Pricing 1="1=1.56, 10=1.405, 25=1.3252, 100=1.0335, 250=1.007, 500=0.8745, 1000=0.742 (USD)", Radiation Hardening=No, Rds On Max=18.5mR, REACH SVHC="No SVHC", Rise Time=9ns, Stock 1=4612, Supplier 1=Digi-Key, Turn-Off Delay Time=31ns, Turn-On Delay Time=13ns, Weight=0.006596oz, Width=4mm
R1 R2 R13 R15: library part AC0805JR-070RL, "Thick Film Resistors - SMD 1/8W 0.0ohm 5%", Case/Package=0805, Case Code (Metric)=2012, Manufacturer=Yageo, Max Operating Temperature=155°C, Max Power Dissipation=125mW, Min Operating Temperature=-55°C, Resistance=0mR, Supplier Part Number 1=YAG3755DKR-ND, Temperature Coefficient=200ppm/°C, Tolerance=5%, Voltage Rating=150V, Case Code (Imperial)=0805, ComponentLink1Description=http://www.yageo.com/documents/recent/PYu-AC_51_RoHS_L_2.pdf?src-supplier=Mouser, ComponentLink1URL=http://www.yageo.com/documents/recent/PYu-AC_51_RoHS_L_2.pdf?src-supplier=Mouser, ComponentLink2Description=http://www.yageo.com/NewPortal/yageodocoutput?fileName=/pdf/R-Chip/PYu-AC_51_RoHS_L_6.pdf&src-supplier=Digi-Key, ComponentLink2URL=http://www.yageo.com/NewPortal/yageodocoutput?fileName=/pdf/R-Chip/PYu-AC_51_RoHS_L_6.pdf&src-supplier=Digi-Key, Composition="Thick Film", Features="Moisture Resistant,Automotive AEC-Q200", Height=0.024inch, Lead Free="Lead Free", Length=0.079inch, Manufacturer Part Number=AC0805JR-070RL, Number of Terminations=2, Packaging="Tape and Reel", Power Rating=125mW, Pricing 1="1=0.1, 10=0.041, 25=0.0296, 50=0.0226, 100=0.0167, 250=0.01272, 500=0.01018, 1000=0.0075 (USD)", Stock 1=15680, Supplier 1=Digi-Key, Termination=SMD/SMT, Width=1.25mm
R3: library part AC0805FR-0710RL, "Res Thick Film 0805 10 Ohm 1% 0.125W(1/8W) ±200ppm/C Sulfur Resistant Molded SMD Automotive Paper T/R", Case/Package=0805, Case Code (Metric)=2012, Manufacturer=Yageo, Max Operating Temperature=155°C, Max Power Dissipation=125mW, Min Operating Temperature=-55°C, Supplier Part Number 1=YAG3690DKR-ND, Temperature Coefficient=200ppm/°C, Tolerance=1%, Voltage Rating=150V, Case Code (Imperial)=0805, ComponentLink1Description=http://www.mouser.com/ds/2/447/yageodocoutput-1111992.pdf?src-supplier=Mouser, ComponentLink1URL=http://www.mouser.com/ds/2/447/yageodocoutput-1111992.pdf?src-supplier=Mouser, ComponentLink2Description=http://www.yageo.com/NewPortal/yageodocoutput?fileName=/pdf/R-Chip/PYu-AC_51_RoHS_L_6.pdf&src-supplier=Digi-Key, ComponentLink2URL=http://www.yageo.com/NewPortal/yageodocoutput?fileName=/pdf/R-Chip/PYu-AC_51_RoHS_L_6.pdf&src-supplier=Digi-Key, ComponentLink3Description=http://www.yageo.com/documents/recent/PYu-AC_51_RoHS_L_2_revised.pdf?src-supplier=Future+Electronics, ComponentLink3URL=http://www.yageo.com/documents/recent/PYu-AC_51_RoHS_L_2_revised.pdf?src-supplier=Future+Electronics, ComponentLink4Description=http://components.arrow.com/part/dataview/0323_03350463?src-supplier=Arrow+Europe, ComponentLink4URL=http://components.arrow.com/part/dataview/0323_03350463?src-supplier=Arrow+Europe, Composition="Thick Film", Depth=1.25mm, Features="Moisture Resistant,Automotive AEC-Q200", Height=0.024inch, Lead Free="Lead Free", Length=2mm, Manufacturer Part Number=AC0805FR-0710RL, Military Standard=Not, Number of Terminations=2, Packaging="Tape and Reel", Power Rating=125mW, Pricing 1="1=0.1, 10=0.086, 100=0.0333, 1000=0.01463, 2500=0.01264 (USD)", Resistance=10R, Stock 1=0, Supplier 1=Digi-Key, Termination=SMD/SMT, Width=1.25mm
R4 R5: library part AC0805FR-071RL, "RES SMD 1 OHM 1% 1/8W 0805", Case/Package=0805, Case Code (Metric)=2012, Manufacturer=Yageo, Max Operating Temperature=155°C, Max Power Dissipation=125mW, Min Operating Temperature=-55°C, Supplier Part Number 1=YAG3705DKR-ND, Temperature Coefficient=200ppm/°C, Tolerance=1%, Voltage Rating=150V, Case Code (Imperial)=0805, ComponentLink1Description=http://www.mouser.com/ds/2/447/yageodocoutput-1111992.pdf?src-supplier=Mouser, ComponentLink1URL=http://www.mouser.com/ds/2/447/yageodocoutput-1111992.pdf?src-supplier=Mouser, Composition="Thick Film", Features="Moisture Resistant,Automotive AEC-Q200", Height=0.024inch, Lead Free="Lead Free", Length=0.079inch, Manufacturer Part Number=AC0805FR-071RL, Number of Terminations=2, Packaging="Tape and Reel", Power Rating=125mW, Pricing 1="1=0.1, 10=0.086, 100=0.0333, 1000=0.01463, 2500=0.01264 (USD)", Resistance=1R, Stock 1=16410, Supplier 1=Digi-Key, Termination=SMD/SMT, Weight=0.000194oz, Width=0.049inch
R6 R7 R9 R10: library part AC0805FR-07200KL, "Res Thick Film 0805 200K Ohm 1% 0.125W(1/8W) ±100ppm/C Epoxy Pad SMD Automotive T/R", Case/Package=0805, Case Code (Metric)=2012, Manufacturer=Yageo, Max Operating Temperature=155°C, Max Power Dissipation=125mW, Min Operating Temperature=-55°C, Resistance=200kR, Supplier Part Number 1=YAG3706DKR-ND, Temperature Coefficient=100ppm/°C, Tolerance=1%, Voltage Rating=150V, Case Code (Imperial)=0805, ComponentLink1Description=http://www.yageo.com/NewPortal/yageodocoutput?fileName=/pdf/R-Chip/PYu-AC_51_RoHS_L_6.pdf&src-supplier=Digi-Key, ComponentLink1URL=http://www.yageo.com/NewPortal/yageodocoutput?fileName=/pdf/R-Chip/PYu-AC_51_RoHS_L_6.pdf&src-supplier=Digi-Key, ComponentLink2Description=http://www.yageo.com/documents/recent/PYu-AC_51_RoHS_L_2.pdf?src-supplier=Future+Electronics, ComponentLink2URL=http://www.yageo.com/documents/recent/PYu-AC_51_RoHS_L_2.pdf?src-supplier=Future+Electronics, ComponentLink3Description=http://www.mouser.com/ds/2/447/yageodocoutput-1111992.pdf?src-supplier=Mouser, ComponentLink3URL=http://www.mouser.com/ds/2/447/yageodocoutput-1111992.pdf?src-supplier=Mouser, Composition="Thick Film", Features="Moisture Resistant,Automotive AEC-Q200", Height=0.024inch, Lead Free="Lead Free", Length=0.079inch, Manufacturer Part Number=AC0805FR-07200KL, Number of Terminations=2, Packaging="Tape and Reel", Power Rating=125mW, Pricing 1="1=0.1, 10=0.048, 100=0.0197, 1000=0.00885, 2500=0.00768 (USD)", Stock 1=15718, Supplier 1=Digi-Key, Termination=SMD/SMT, Width=0.049inch
R8 R11: library part AC0805FR-0710KL, "RES SMD 10K OHM 1% 1/8W 0805", Case/Package=0805, Case Code (Metric)=2012, Manufacturer=Yageo, Max Operating Temperature=155°C, Max Power Dissipation=125mW, Min Operating Temperature=-55°C, Package Quantity=1, Resistance=10kR, Supplier Part Number 1=311-10KLGDKR-ND, Temperature Coefficient=100ppm/°C, Tolerance=1%, Voltage Rating=150V, Case Code (Imperial)=0805, ComponentLink1Description=http://www.yageo.com/NewPortal/yageodocoutput?fileName=/pdf/R-Chip/PYu-AC_51_RoHS_L_6.pdf&src-supplier=Mouser, ComponentLink1URL=http://www.yageo.com/NewPortal/yageodocoutput?fileName=/pdf/R-Chip/PYu-AC_51_RoHS_L_6.pdf&src-supplier=Mouser, Composition="Thick Film", Depth=1.25mm, Features="Moisture Resistant,Automotive AEC-Q200,Anti-Sulfur", Height=0.024inch, Lead Free="Lead Free", Length=0.079inch, Manufacturer Part Number=AC0805FR-0710KL, Military Standard=Not, Number of Terminations=2, Packaging="Tape and Reel", Power Rating=125mW, Pricing 1="1=0.1, 10=0.048, 100=0.0197, 1000=0.00885, 2500=0.00768 (USD)", Stock 1=552255, Supplier 1=Digi-Key, Termination=SMD/SMT, Width=0.049inch
R12 R14 R16 R17 R18: library part RES
U1: "IC MAIN PWR CTRLR QUAD 32-QFN", Case/Package=QFN, Manufacturer=Intersil, Max Operating Temperature=100°C, Min Operating Temperature=-40°C, Output Current=20A, Package Quantity=60, Supplier Part Number 1=ISL6236AIRZ-ND, Switching Frequency=500kHz, ComponentLink1Description=http://www.intersil.com/content/dam/Intersil/documents/isl6/isl6236a.pdf?src-supplier=Avnet+Europe, ComponentLink1URL=http://www.intersil.com/content/dam/Intersil/documents/isl6/isl6236a.pdf?src-supplier=Avnet+Europe, Height=0.95mm, Lead Free="Lead Free", Length=5mm, Manufacturer Part Number=ISL6236AIRZ, Mount="Surface Mount", Number of Outputs=2, Packaging=Rail/Tube, Pricing 1="600=3.68 (USD)", Radiation Hardening=No, Stock 1=0, Supplier 1=Digi-Key, Width=5mm

## Via types
v1: diameter 0.6, hole 0.3, L1 to L6, tented both sides, 57 vias

## Nets (pads, with @x,y where several pads share a name; then routed paths per layer and width w, separated by ;. In a path a pad name is that pad's centre, name@x,y a point inside that pad or via, vN(x,y) a via of type N, cw(c..) or ccw(c..) an arc to the next point about the centre after c; other vN are vias at no path point)
+1V5: C9.1 J3.1 L1.1 R12.2 U1.10 | length 27.5
  L1 w0.2: L1.1 34.7,13 v1(35.5,13.8) 36,14.3 C9.1 41.2,14.3 41.5,14 J3.1
  L3 w0.2: v1(30.75,19.55) 35.5,14.8 v1(35.5,13.8)
  L6 w0.2: U1.10 26.25,21.95 26.7,21.5 27.5,21.5 28.8,20.2 29.5,20.2 29.7,20 R12.2 v1(30.75,19.55)
+1V05: C10.1 J4.1 L2.2 U1.30 | length 27.8
  L1 w0.2: L2.2 34.3,37 v1(35.3,36) 35.7,35.6 38.5,35.6 C10.1 41.5,35.7 41.8,36 J4.1
  L3 w0.2: v1(25.5,28.9) 32.6,36 v1(35.3,36)
  L6 w0.2: v1(25.5,28.9) 25.5,28.431 25.75,28.181 U1.30
+5V_LDO: C1.2 R1.2 U1.7 | length 26.1
  L3 w0.2: v1(12,25) 15.2,25 15.9,25.7 18.3,25.7 20.2,23.8 21.9,23.8 23.1,22.6 26.8,22.6 27.25,23.05 v1(29.85,23.05)
  L6 w0.2: v1(12,25) R1.2 ; U1.7 28.15,23.75 28.7,23.2 28.7,22.2 29.2,21.7 29.75,21.7 C1.2 v1(29.85,23.05)
+5V_PVCC: C3.2 R1.1 R2.2 R3.2 U1.19 | length 13.5
  L6 w0.2: R3.2@15.25,29.55 R1.1 15.6,25 16.2,25.6 19.4,25.6 19.55,25.45 C3.2 20.6,24.6 21.3,23.9 21.8,23.9 22.15,24.25 U1.19
+5V_VCC: C4.2 R3.1 R8.2 R9.2 R10.2 R11.2 R13.2 R16.1 U1.2 U1.3 U1.20 | length 78.8
  L4 w0.2: v1(12,35.1) v1(12,32.8) v1(12,29.6) 12.1,29.5 14.8,29.5 19.7,24.6 21.6,24.6 v1(21.75,24.75) ; v1(27.4,16.3) 27.3,16.3 26.6,17 23.4,17 v1(22.7,16.3) 21.75,17.25 v1(21.75,24.75) ; v1(29.85,37.35) 29.85,37.15 v1(28.7,36) 28.7,32.5 v1(30.05,31.15) 30.35,31.15 31.5,30 31.5,22 30.6,21.1 25.4,21.1 v1(21.75,24.75)
  L6 w0.2: v1(12,29.6) R3.1 ; v1(12,32.8) R10.2 ; v1(12,35.1) R9.2 ; v1(21.75,24.75) U1.20 ; v1(22.7,16.3) R11.2 ; R16.1 v1(28.7,36) ; v1(27.4,16.3) R13.2 ; U1.3 27.95,25.75 28.3,26.1 28.3,26.3 ; U1.2 28.25,26.25 28.3,26.3 ; R8.2 v1(29.85,37.35) ; v1(30.05,31.15) C4.2 30.05,28.7 29.334,28.7 28.3,27.666 28.3,26.3
+REF: C12.1 R14.2 U1.1 | length 10.7
  L6 w0.2: R14.2 C12.1 30,33.65 30,32.8 28.7,31.5 28.7,28.9 27.4,27.6 U1.1
+VIN: C2.2 C5.2 C6.2 J1.1 Q1.8 Q2.8 R2.1 U1.6 | length 69.9
  L1 w0.2: Q1.8 17.227,17.327 18.15,18.25 C5.2 12,26.15 v1(12,27.3) ; Q2.8 15.695,40.905 15.05,41.55 C6.2 12.535,41.485 11.452,41.485 5,35.033 J1.1 7.7,27.3 v1(12,27.3) ; v1(29.95,25.35) 26.299,25.35 25.549,24.6 23.851,24.6 23.401,24.15 17.65,24.15 14.5,27.3 v1(12,27.3)
  L6 w0.2: v1(12,27.3) R2.1 ; U1.6 29.9,24.25 C2.2 v1(29.95,25.35)
+VREF3: C11.1 R15.2 U1.5 | length 25.6
  L6 w0.2: R15.2 27.45,38.2 32.2,38.2 35,35.4 35,29.2 33.7,27.9 30.3,27.9 30,27.6 C11.1 29.5,26.6 29.1,26.2 29.1,25.3 28.55,24.75 U1.5
EN1: R11.1 U1.14 | length 3.9
  L6 w0.2: R11.1 22.7,20.2 22.9,20.4 23.2,20.4 24.25,21.45 U1.14
EN_LDO: R8.1 U1.4 | length 17.7
  L6 w0.2: U1.4 28.05,25.25 28.7,25.9 28.7,27.5 29.5,28.3 33,28.3 34.4,29.7 34.4,34.3 32.7,36 R8.1
FB1: R12.1 R13.1 R17.2 U1.11 | length 10.5
  L6 w0.2: U1.11 25.75,21.35 26.1,21 27,21 27.4,20.6 R13.1 28.25,19.55 28.5,19.3 28.5,17.8 28.65,17.65 R12.1 R17.2
GND: C1.1 C2.1 C3.1 C4.1 C5.1 C6.1 C9.2 C10.2 C11.2 C12.2 J2.1 J5.1 J6.1 Q1.2 Q1.3 Q2.2 Q2.3 R6.2 R7.1 R17.1 R18.2 U1.8 U1.21 U1.22 U1.29 U1.33 | length 34.4
  L1 w0.2: v1(10.751,14.365) Q1.3 ; v1(10.751,15.635) Q1.2 ; v1(10.751,38.365) Q2.3 ; v1(10.751,39.635) Q2.2 ; v1(13.628,20) C5.1 ; C6.1 v1(19.572,44) ; C9.2 v1(38.6,22.6) ; v1(38.6,27.4) C10.2
  L6 w0.2: v1(16.3,24.6) C3.1 ; v1(20.6,25.2) 21.351,25.2 21.501,25.35 21.999,25.35 22.149,25.2 22.55,25.2 U1.21 ; v1(21.2,25.8) 22.55,25.8 U1.22 ; v1(24.45,31.75) R6.2 ; v1(24.7,29) 24.7,28.666 25.25,28.116 U1.29 ; v1(25,16.3) R7.1 ; R18.2 v1(28.7,40.6) ; U1.8 27.4,22.5 v1(27.7,22.2) ; C2.1 v1(33.2,24.3) ; C11.2 v1(33.25,26.6) ; C4.1 v1(33.3,29.8) ; C12.2 v1(33.3,33.7) ; R17.1 v1(33.35,19.55) ; C1.1 v1(34.3,21.8)
  other v1: 24.1,24 25.8,24 25.7,25.6 24.1,25.7
LGATE1: Q1.4 U1.18 | length 21.4
  L1 w0.2: Q1.4 v1(13.595,13.095)
  L3 w0.2: v1(13.595,13.095) 12.4,14.29 12.4,21.3 14.3,23.2 v1(20.8,23.2)
  L6 w0.2: v1(20.8,23.2) 21.117,23.517 21.134,23.5 21.966,23.5 22.216,23.75 U1.18
LGATE2: Q2.4 U1.23 | length 19.5
  L1 w0.2: Q2.4 v1(13.595,37.095)
  L3 w0.2: v1(13.595,37.095) 15.905,37.095 17.2,35.8 17.2,28.6 19.6,26.2 20,26.6 v1(21.1,26.6)
  L6 w0.2: v1(21.1,26.6) 21.3,26.4 21.949,26.4 22.149,26.2 22.55,26.2 U1.23
NetC7_2: C7.2 R4.1 | length 2.4
  L6 w0.2: C7.2 17.65,22.1 R4.1
NetC8_1: C8.1 R5.2 | length 2.5
  L6 w0.2: C8.1 17.85,29.1 R5.2
NetR4_2: R4.2 U1.17 | length 3.2
  L6 w0.2: R4.2 21.2,22.3 22,23.1 22.45,23.1 U1.17
NetR5_1: R5.1 U1.24 | length 3.2
  L6 w0.2: R5.1 20.05,27.2 21.714,27.2 22.164,26.75 U1.24
NetR6_1: R6.1 U1.31 | length 2.6
  L6 w0.2: R6.1 26.25,29.4 U1.31
NetR7_2: R7.2 U1.12 | length 3.2
  L6 w0.2: R7.2 25,20.2 25.25,20.45 U1.12
PHASE1: C7.1 L1.2 Q1.5 Q1.6 Q1.7 U1.16 | length 19.9
  L1 w0.2: Q1.7 Q1.6 Q1.5 v1(19,13.095) 22.23,13.095 L1.2
  L3 w0.2: v1(19,13.095) 19.55,13.645 v1(19.55,18.25)
  L6 w0.2: v1(19.55,18.25) C7.1 20.5,20 22.4,21.9 23.1,21.9 23.25,22.05 U1.16
PHASE2: C8.2 L2.1 Q2.5 Q2.6 Q2.7 U1.25 | length 20
  L1 w0.2: Q2.7 Q2.6 Q2.5 v1(19.5,37.095) 22.23,37.095 L2.1
  L3 w0.2: v1(19.5,37.095) 19.5,31.1 v1(19.55,31.05)
  L6 w0.2: v1(19.55,31.05) C8.2 21.35,29.3 U1.25
POK1: R10.1 U1.13 U1.27 | length 37.9
  L3 w0.2: v1(21.7,31.5) 23.5,29.7 23.5,28.5 24.3,27.7 29.6,27.7 30.9,26.4 30.9,21.5 30.05,20.65 v1(24.45,20.65)
  L6 w0.2: R10.1 20.4,32.8 v1(21.7,31.5) 23.3,29.9 23.3,28.934 24.25,27.984 U1.27 ; v1(24.45,20.65) 24.75,20.95 U1.13
POK2: R9.1 U1.28 | length 14.4
  L6 w0.2: R9.1 19.9,35.1 23.7,31.3 23.7,29.1 24.75,28.05 U1.28
REFIN2: R14.1 R15.1 R16.2 R18.1 U1.32 | length 14.7
  L6 w0.2: R18.1 R15.1 R14.1 25.45,32.95 25.8,32.6 26.8,32.6 27.2,32.2 27.2,28.5 26.75,28.05 U1.32
UGATE1: Q1.1 U1.15 | length 14.5
  L1 w0.2: Q1.1 v1(13.595,16.905)
  L3 w0.2: v1(13.595,16.905) 17.89,21.2 v1(22.8,21.2)
  L6 w0.2: v1(22.8,21.2) 23.3,21.2 23.75,21.65 U1.15
UGATE2: Q2.1 U1.26 | length 22.8
  L1 w0.2: Q2.1 v1(13.595,40.905)
  L3 w0.2: v1(13.595,40.905) 16.495,40.905 17.9,39.5 17.9,30.5 19.2,29.2 v1(22.5,29.2)
  L6 w0.2: v1(22.5,29.2) 22.5,29.1 23.75,27.85 U1.26
pads on no net: U1.9

## Polygon pours and split planes (outlines as drawn)
GND on L2 (split plane): 49.49,0.51 0.51,0.51 0.51,49.49 49.49,49.49
GND on L5 (split plane): 49.49,0.51 0.51,0.51 0.51,49.49 49.49,49.49